# Altium PCB PCB1.PcbDoc
Units mil, origin at the board's own origin, x right, y up, seen from the top; angles counter-clockwise.
Board outline 3306.97 x 3267.27 mil, 2 copper layers (Component Side, Bottom Layer), stack 12.8 mil thick; 73 components, 54 nets, 311 pads, 524 vias.
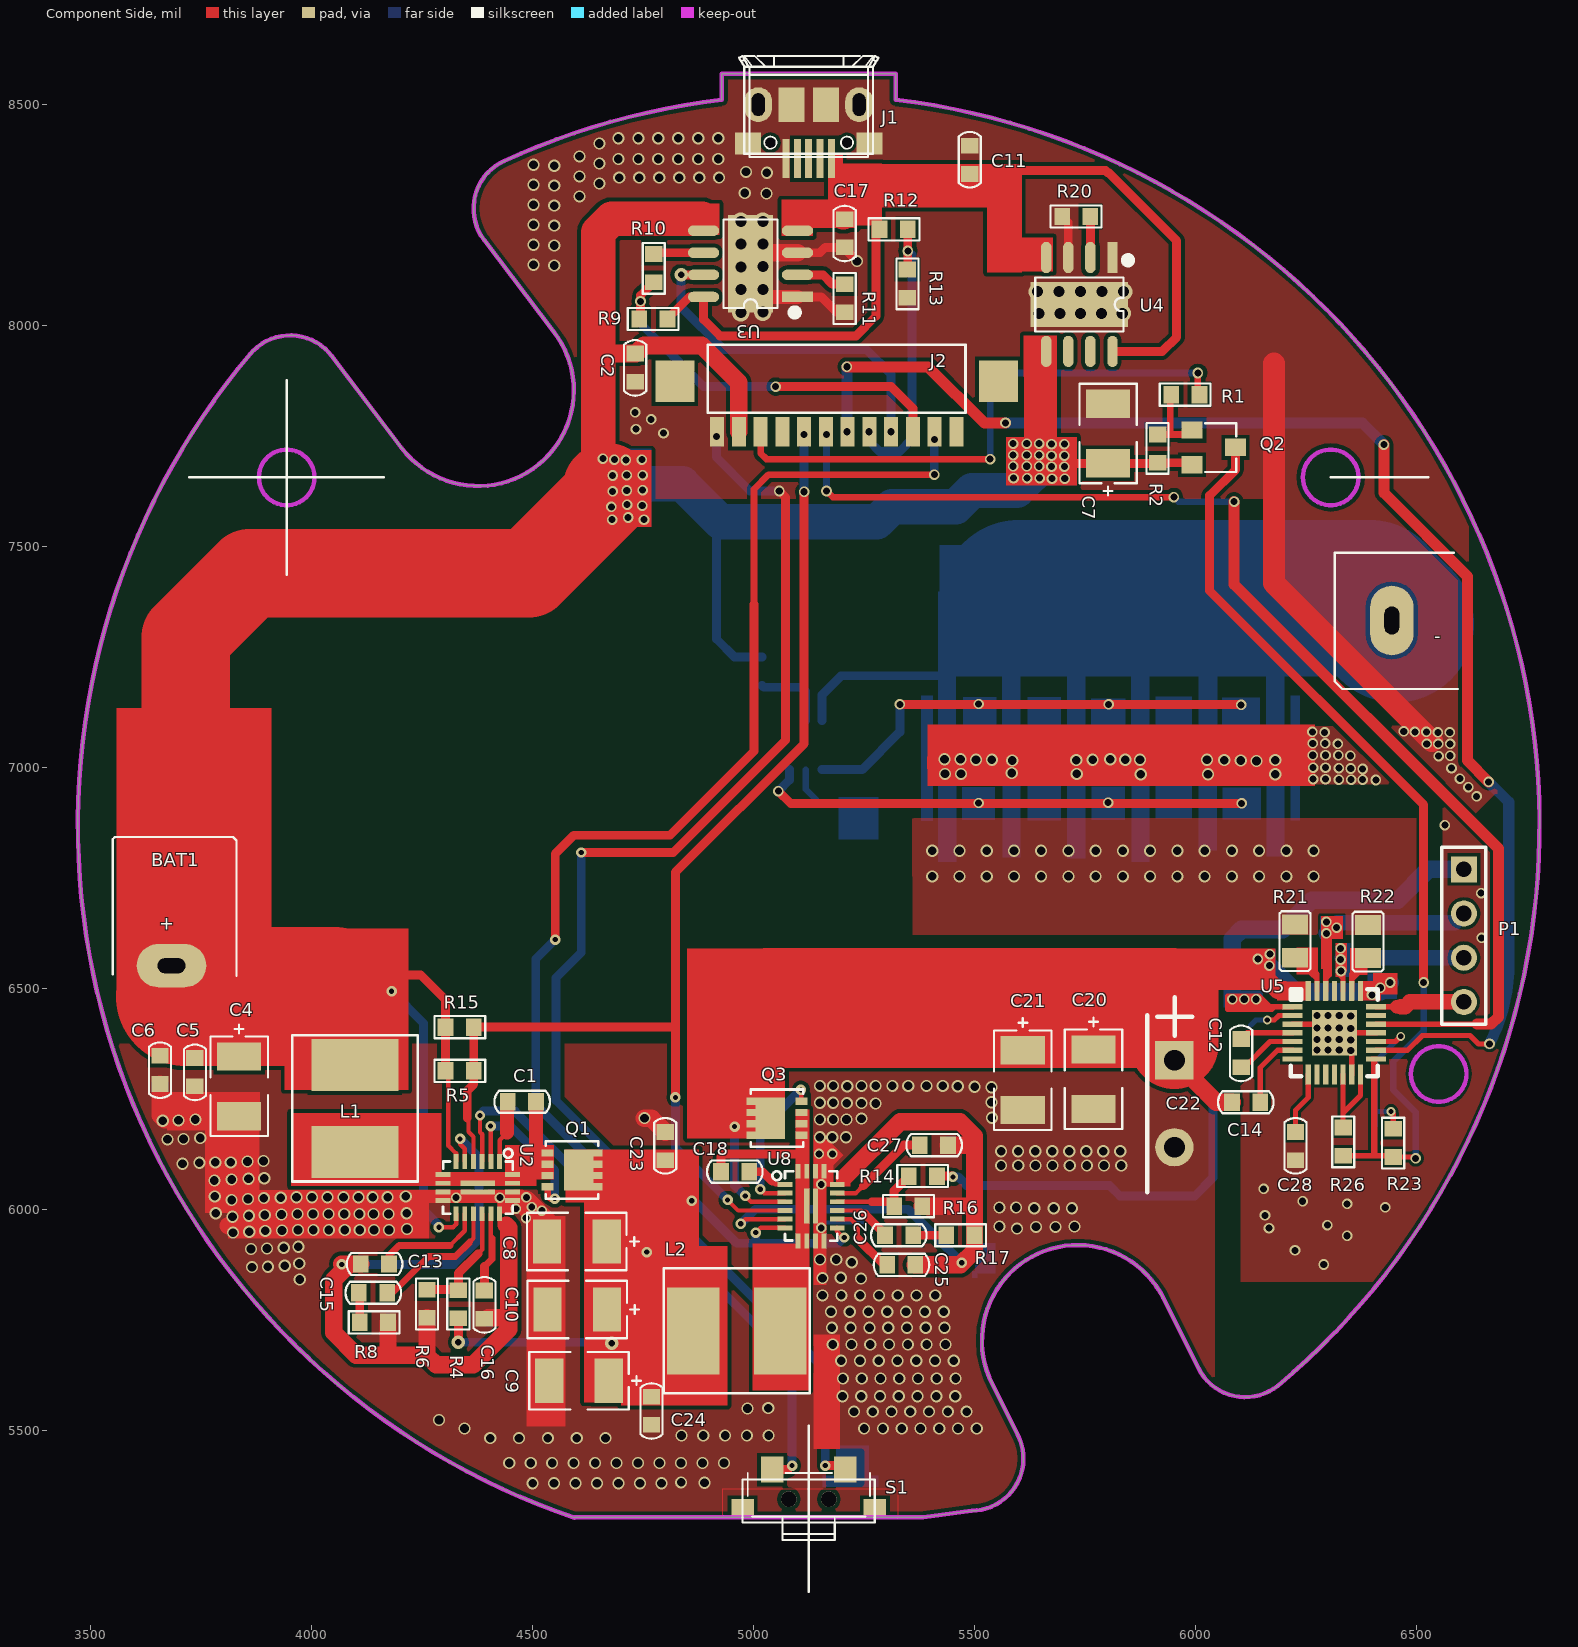
[diagram p0: Component Side view]
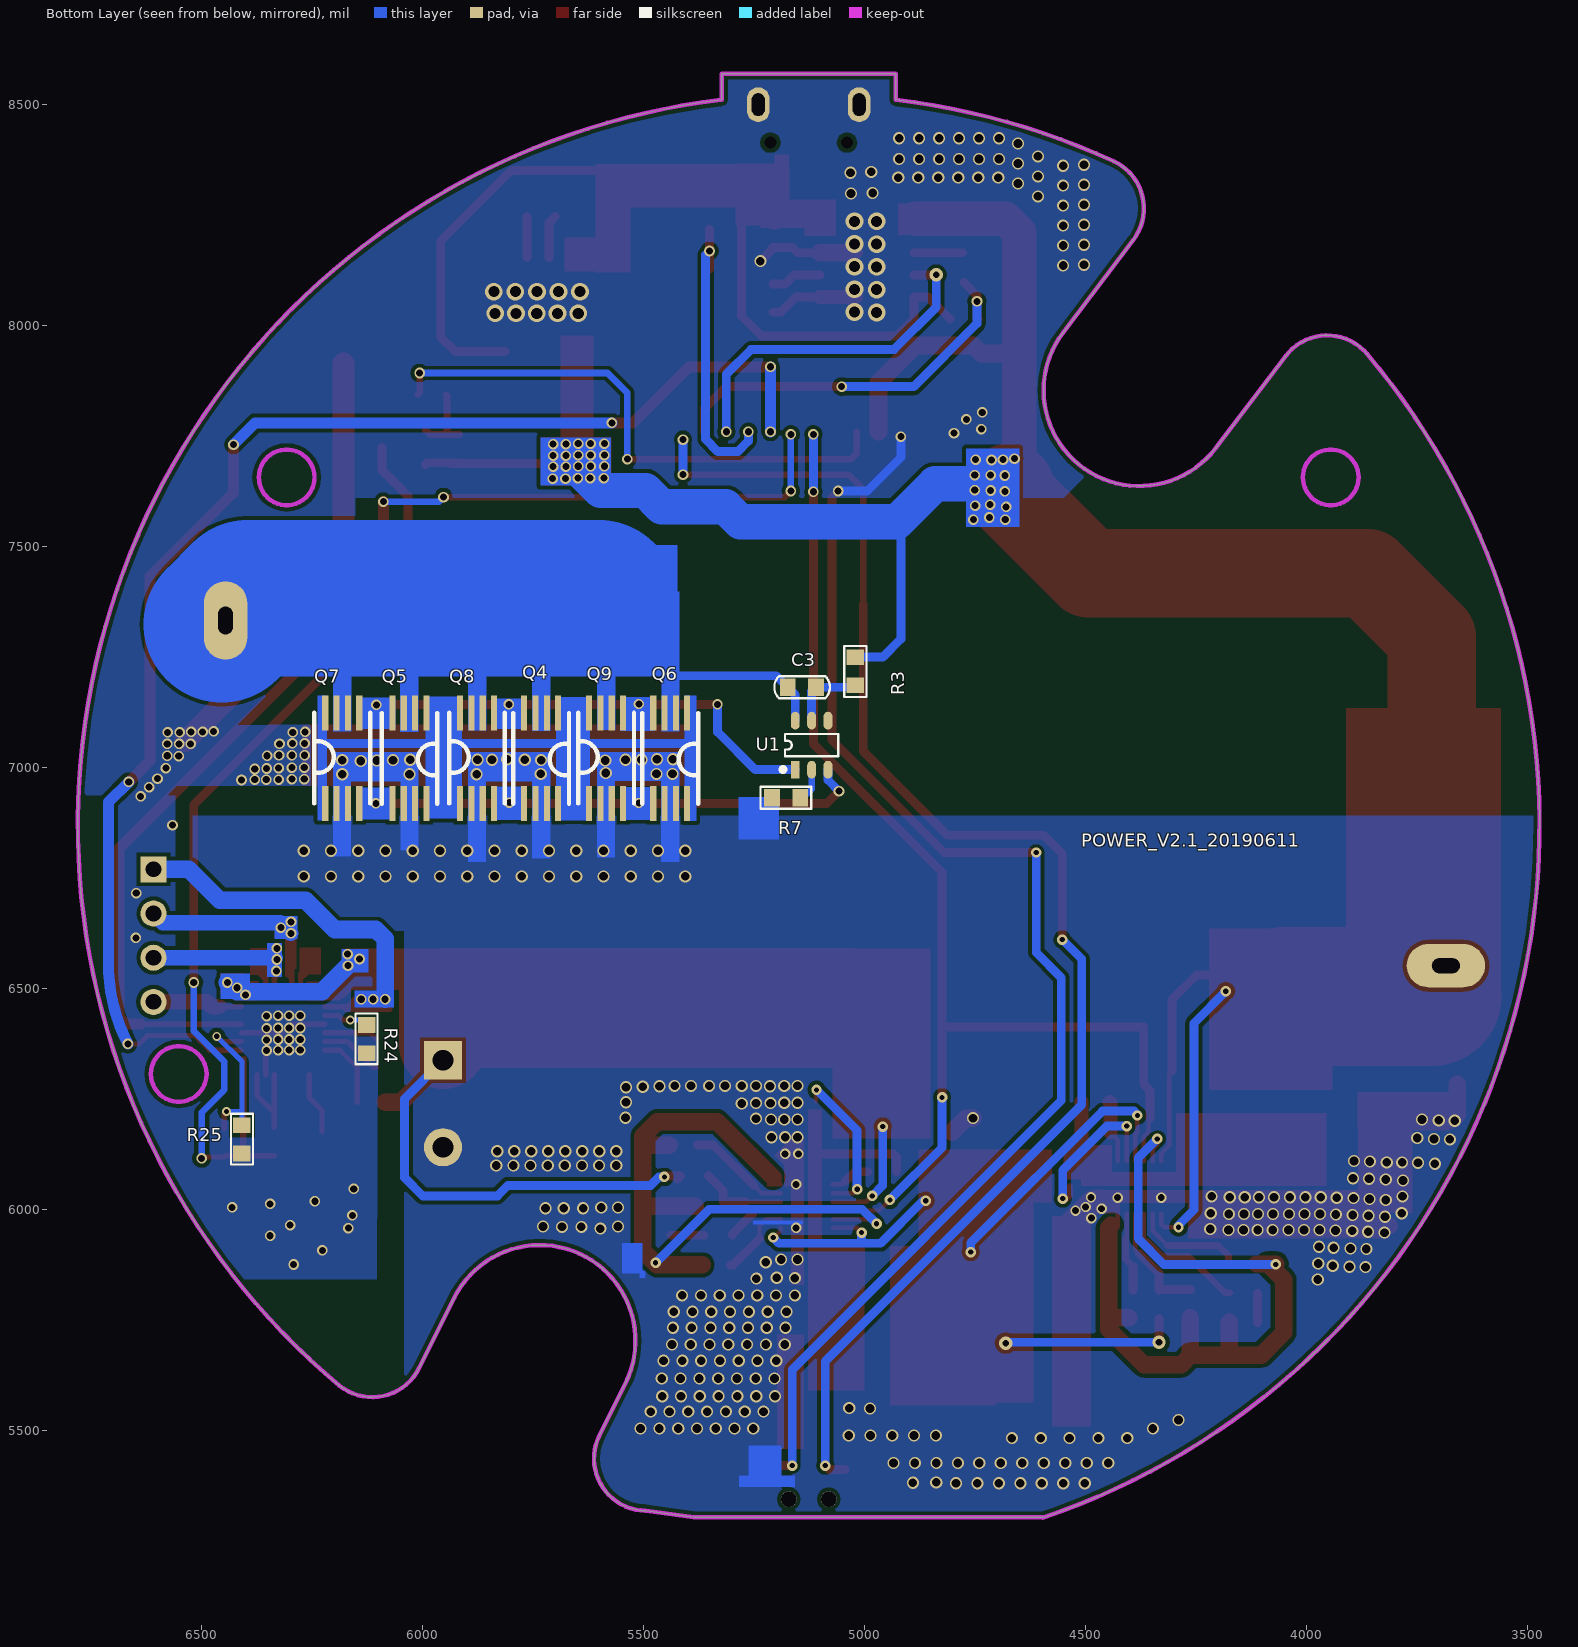
[diagram p1: Bottom Layer view, seen from below]

## Layer stack, top to bottom
Top Solder: solder mask 0.4, Solder Resist, Dk 3.5
Component Side: signal copper 1.4
Dielectric 1: core 10, FR-4, Dk 4.2
Bottom Layer: signal copper 1.4
Solder Side: solder mask 0.4, Solder Resist, Dk 3.5

## Board outline
4205.22,7722.68 4046.52,7931.5 ccw(c3952.49,7860.03) 3862.24,7936.23 3862.25,7936.24 ccw(c5125.65,6869.45) 4596.01,5303.03 4596.26,5303.74 5385.14,5303.74 5494.14,5318.42 5494.96,5318.74 ccw(c5493.31,5436.84) 5598.95,5489.66 5540.52,5606.51 cw(c5734.2,5703.35) 5927.88,5800.19 6007.48,5640.97 ccw(c6113.12,5693.79) 6187.33,5601.9 6187.4,5601.82 ccw(c5125.65,6869.45) 5322.5,8511.24 5322.5,8570.29 4928.8,8570.29 4928.8,8511.24 ccw(c5125.65,6869.45) 4436.1,8372.36 ccw(c4485.35,8265.01) 4391.32,8193.54 4550.01,7984.73 cw(c4377.62,7853.71)

## Design rules (kind name [scope] priority, off if disabled: settings)
Clearance [All] p1: gap=7
ComponentClearance [All] p1 off: gap=10 collisioncheckmode=3 verticalgap=10 showdistances=FALSE
Height [All] p1 off: minheight=0 maxheight=1000 prefheight=500
HoleSize [All] p1: absolutevalues=TRUE maxlimit=1000 minlimit=1 maxpercent=80.000 minpercent=20.000
HoleToHoleClearance [All] p1 off: gap=10 allowstackedmicrovias=TRUE
MinimumSolderMaskSliver [All] p1 off: minsoldermaskwidth=10
NetAntennae [All] p1 off: netantennaetolerance=0
PolygonConnect [All] p1: connectstyle=Direct reliefconductorwidth=10 reliefentries=4 polygonreliefangle="90 Angle" airgapwidth=10
RoutingVias [All] p1: holewidth=28 width=50 viastyle="Through Hole" minholewidth=28 minwidth=50 maxholewidth=28 maxwidth=50
SilkToSilkClearance [All] p1 off: silktosilkclearance=10
SilkToSolderMaskClearance [IsPad] p1 off: minsilkscreentomaskgap=10 clearancetoexposedcopper=TRUE
SolderMaskExpansion [All] p1: expansion=4
Width [All] p1: maxlimit=1000 minlimit=10 preferedwidth=10 minimp=50.000000 maximp=50.000000 favimp=50.000000
22 further rules are at their usual default settings.

## Components (designator, comment, footprint, x,y, rotation, side; value= is the part's Value field where it differs from the comment)
BAT1 "BAT1" BAT18650_DIP2 5125.65,6869.45 r0 top
C1 "0.1uF" C0603 4445,6244 r0 top
C2 "10uF" C0603 4733,7937 r270 top
C3 "0.1uF" C0603 5173,7182 r180 bottom
C4 "220uf/6.3V" C1210-E 3837,6279 r270 top
C5 "10uF" C0603 3737,6343 r270 top
C6 "0.1uF" C0603 3658,6348 r270 top
C7 "220uF/6.3V" C1210-E 5803,7756 r90 top
C8 "22uF/25v" C1210-E 4601,5928 r180 top
C9 "22uF/25v" C1210-E 4606,5613 r180 top
C10 "22uF/25v" C1210-E 4602,5774 r180 top
C11 "10uF" C0603 5490,8343 r90 top
C12 "0.1uF" C0603 6104,6386 r270 top
C13 "2.2uF" C0603 4176,5877 r180 top
C14 "0.1uF" C0603 6147,6243 r180 top
C15 "6.8nF" C0603 4108,5812 r0 top
C16 "2.2uF" C0603 4392,5817 r270 top
C17 "10uF" C0603 5207,8241 r270 top
C18 "0.1uF" C0603 4991,6086 r180 top
C20 "22uF/25v" C1210-E 5770,6295 r270 top
C21 "22uF/25v" C1210-E 5610,6293 r270 top
C22 "22uF/25v" CAP12R5X30 5953,6338 r90 top
C23 "10uF" C0603 4801,6112 r90 top
C24 "0.1uF" C0603 4770,5577 r270 top
C25 "2.2uF" C0603 5303,5875 r0 top
C26 "6.8nF" C0603 5362,5942 r180 top
C27 "2.2uf" C0603 5377,6146 r0 top
C28 "0.1uF" C0603 6227,6112 r90 top
J1 "HEADER_6_2" MICRO_USB_J 5125.65,8500 r180 top
J2 "CON12" CON_12WT 5189,7760 r180 top
L1 "1.5uH/10W" L0630 4099,6229 r270 top
L2 "1.5uH" L0630 4963,5726 r0 top
P1 "Header 4" HDR1X4 6608,6770 r270 top
Q1 "FDMC7678" FDMC7678 4590,6090 r270 top
Q2 "SI2305" SOT23 5993,7764 r270 top
Q3 "FDMC7678" FDMC7678 5054,6207 r90 top
Q4 "8205A" TSSOP8 5731,7123.63 r0 bottom
Q5 "8205A" TSSOP8 6029,7123.63 r0 bottom
Q6 "8205A" TSSOP8 5439,7123.63 r0 bottom
Q7 "8205A" TSSOP8 6181,6918.91 r180 bottom
Q8 "8205A" TSSOP8 5876,6918.91 r180 bottom
Q9 "8205A" TSSOP8 5584,6918.91 r180 bottom
R1 "10K" R0603 6010,7844 r180 top
R2 "100K" R0603 5915,7690 r90 top
R3 "100R" R0603 5020,7250 r270 bottom
R4 "100K" R0603 4333,5754 r90 top
R5 "100K" R0603 4304,6314 r0 top
R6 "18K" R0603 4262,5819 r270 top
R7 "1K" R0603 5145,6932 r0 bottom
R8 "21K" R0603 4110,5745 r0 top
R9 "22K" R0603 4806,8015 r180 top
R10 "1K" R0603 4775,8162 r270 top
R11 "1.3K" R0603 5207,8094 r270 top
R12 "47K" R0603 5286,8218 r0 top
R13 "51K" R0603 5349,8127 r270 top
R14 "100K" R0603 5416,6076 r180 top
R15 "100K" R0603 4304,6413 r0 top
R16 "10K" R0603 5319,6008 r0 top
R17 "21K" R0603 5437,5942 r0 top
R20 "1.3K" R0603 5763,8247 r180 top
R21 "0.1R" R0805 6226,6570 r90 top
R22 "0.1R" R0805 6391,6569 r90 top
R23 "30K" R0603 6448,6183 r270 top
R24 "100K" R0603 6126,6354 r90 bottom
R25 "10K" R0603 6408,6127 r90 bottom
R26 "100K" R0603 6335,6186 r270 top
S1 "SW_3X6X5" SW3X6X3R5 5125.65,5345 r0 top
U1 "DW01B" SOT23-6 5119,7051 r180 bottom
U2 "MP3428A" QFN22 4377,6050 r270 top
U3 "TP4056" SOIC8E 4994,8140 r90 top
U4 "TP4056" SOIC8E 5738,8048 r180 top
U5 "A4988" QFN28 6315,6400 r0 top
U8 "MP3428A" QFN22 5131,6008 r0 top

## Footprints (in the part's own frame and the unit in brackets; to place one, negate y for a bottom-side part, rotate by r counter-clockwise, add the part's x,y. Pads: shape width x height; smd on the part's side, far side on the other; paste and mask are expansions set on the pad)
BAT18650_DIP2 [mm]
  oval 4x2.5 / inner oval 4x2 / far side oval 4.5x2.5 hole 0.85 slot 1.6 at 0 deg: 1(-36.618,-8.063)
  oval 2.5x4 / inner oval 2x4 / far side oval 2.5x4.5 hole 0.85 slot 1.6 at 90 deg: 2(33.512,11.774)
C0603 [mm]
  rect 0.9x1 smd: 1(0,0) 2(1.62,0)
  silkscreen extent -0.77,-0.64 2.42,0.64
C1210-E [mil]
  rect 64x100 smd: 1(-67.5,0) 2(67.5,0)
  silkscreen extent -140,-65 113,65
CAP12R5X30 [mm]
  rect 2.2x2.2 / inner rect 2x2 / far side rect 2.2x2.2 hole 1.2: 1(0,0)
  round 2.2 / inner round 2 / far side round 2.2 hole 1.2: 2(-5,0)
  silkscreen extent -7.58,-1.02 3.61,1.56
CON_12WT [mm]
  rect 0.8x1.7 smd: 1(-6.875,0) 2(-5.625,0) 3(-4.375,0) 4(-3.125,0) 5(-1.875,0) 6(-0.625,0) 7(0.625,0) 8(1.875,0) 9(3.125,0) 10(4.375,0) 11(5.625,0) 12(6.875,0)
  rect 2.25x2.4 smd: 13(9.3,-2.9) 14(-9.3,-2.9)
  silkscreen extent -7.4,-5 7.4,-1.1
FDMC7678 [mm]
  rect 0.42x0.7 smd: 1(-0.975,-1.4) 2(-0.325,-1.4) 3(0.325,-1.4) 4(0.975,-1.4) 5(0.975,1.4) 6(0.325,1.4) 7(-0.325,1.4) 8(-0.975,1.4)
  rect 2.37x1.7 smd: 9(0,0.381)
  silkscreen extent -1.65,-1.5 1.65,1.5
HDR1X4 [mm] "Connector; Header; 4 Position"
  rect 1.5x1.5 hole 0.9: 1(0,0)
  round 1.5 hole 0.9: 2(2.54,0) 3(5.08,0) 4(7.62,0)
  silkscreen extent -1.27,-1.27 8.89,1.27
L0630 [mm]
  rect 3x5 smd: 1(-2.5,0) 2(2.5,0)
  silkscreen extent -4.2,-3.6 4.2,3.6
MICRO_USB_J [mm]
  rect 0.4x2.25 smd: 1(-1.3,3.1) 2(-0.65,3.1) 3(0,3.1) 4(0.65,3.1) 5(1.3,3.1)
  oval 1.6x2 / inner oval 1.3x1.6 / far side oval 1.3x2 hole 0.75 slot 1.3 at 90 deg: 6(-2.9,0) 7(2.9,0)
  rect 1.5x2 smd: 8(-1,0) 9(1,0)
  rect 1.5x1.25 smd: 10(-3.5,2.225) 11(3.5,2.225)
  round 0.6 hole 0.7: 12(2.2,2.18) 13(-2.2,2.18)
  silkscreen extent -3.7,-2.8 3.7,3
QFN22 [mm]
  rect 0.85x0.28 smd: 1(-1.5,1.25) 2(-1.5,0.75) 3(-1.5,0.25) 4(-1.5,-0.25) 5(-1.5,-0.75) 6(-1.5,-1.25) 11(1.5,-1.25) 12(1.5,-0.75) 13(1.5,-0.25) 14(1.5,0.25) 15(1.5,0.75) 16(1.5,1.25)
  rect 0.28x0.85 smd: 7(-0.75,-2) 8(-0.25,-2) 9(0.25,-2) 10(0.75,-2) 17(0.75,2) 18(0.25,2) 19(-0.25,2) 20(-0.75,2)
  rect 0.3x2 smd: 21(-0.25,0) 22(0.25,0)
  silkscreen extent -2.22,-2 1.5,2
QFN28 [mm]
  rect 2.6x2.6 smd: 0(0,0)
  rect 1.15x0.3 smd: 1(-2.4,1.5) 2(-2.4,1) 3(-2.4,0.5) 4(-2.4,0) 5(-2.4,-0.5) 6(-2.4,-1) 7(-2.4,-1.5) 15(2.4,-1.5) 16(2.4,-1) 17(2.4,-0.5) 18(2.4,0) 19(2.4,0.5) 20(2.4,1) 21(2.4,1.5)
  rect 0.3x1.15 smd: 8(-1.5,-2.4) 9(-1,-2.4) 10(-0.5,-2.4) 11(0,-2.4) 12(0.5,-2.4) 13(1,-2.4) 14(1.5,-2.4) 22(1.5,2.4) 23(1,2.4) 24(0.5,2.4) 25(0,2.4) 26(-0.5,2.4) 27(-1,2.4) 28(-1.5,2.4)
  silkscreen extent -2.5,-2.5 2.5,2.5
R0603 [mm]
  rect 0.9x1 smd: 1(0,0) 2(1.62,0)
  silkscreen extent -0.64,-0.64 2.29,0.64
R0805 [mm]
  rect 1.14x1.5 smd: 1(0,0) 2(1.91,0)
  silkscreen extent -0.76,-0.89 2.67,0.89
SOIC8E [mm]
  rect 0.6x1.8 smd: 1(-1.905,-2.7)
  oval 0.6x1.8 smd: 2(-0.635,-2.7) 3(0.635,-2.7) 4(1.905,-2.7) 5(1.905,2.7) 6(0.635,2.7) 7(-0.635,2.7) 8(-1.905,2.7)
  rect 5.588x2.6 smd: 9(0,0)
  silkscreen extent -3.08,-2.82 2.54,1.55
SOT23 [mm]
  rect 1x1.2 smd: 1(0,0) 2(2,0) 3(1,2.5)
  silkscreen extent -0.38,0.76 2.41,2.54
SOT23-6 [mil]
  rect 20x40 smd: 1(-37,-55.5)
  oval 20x40 smd: 2(0,-55.5) 3(37,-55.5) 4(37,55.5) 5(0,55.5) 6(-37,55.5)
  silkscreen extent -70,-60 60,25
SW3X6X3R5 [mm]
  rect 1.3x1.5 smd: 1(-2.1,1.7) 2(2.1,1.7)
  rect 1.3x1 smd: 3(3.8,-0.5) 4(-3.8,-0.5)
  round 0.9 hole 0.9 unplated: 5(-1.15,0) 6(1.15,0)
  silkscreen extent -3.5,-2 3.52,1.51
TSSOP8 [mm]
  rect 0.35x2 smd: 1(-0.975,0) 2(-0.325,0) 3(0.325,0) 4(0.975,0) 5(0.975,5.2) 6(0.325,5.2) 7(-0.325,5.2) 8(-0.975,5.2)
  silkscreen extent -1.6,0 1.6,5.21

## Part data
C1 C2 C3 C4 C5 C6 C7 C8 C9 C10 C11 C12 C13 C14 C15 C16 C17 C18 C20 C21 C22 C23 C24 C25 C26 C27 C28: library part C
L1 L2: library part L
P1: "Header, 4-Pin"
Q2: library part FDN338P
Q4 Q5 Q6 Q7 Q8 Q9: library part 8205A-TSSOP8
R1 R2 R3 R4 R5 R6 R7 R8 R9 R10 R11 R12 R13 R14 R15 R16 R17 R20 R21 R22 R23 R24 R25 R26: library part R
U1: library part DW01V

## Via types
v1: diameter 27.56, hole 19.68, Component Side to Bottom Layer, 312 vias
v2: diameter 24, hole 16, Component Side to Bottom Layer, 144 vias
v3: diameter 23.62, hole 11.81, Component Side to Bottom Layer, 24 vias
v4: diameter 40, hole 25, Component Side to Bottom Layer, 20 vias
v5: diameter 23.62, hole 15.75, Component Side to Bottom Layer, 18 vias
v6: diameter 20, hole 12, Component Side to Bottom Layer, 3 vias
v7: diameter 30, hole 15, Component Side to Bottom Layer, 3 vias

## Nets (pads, with @x,y where several pads share a name; then routed paths per layer and width w, separated by ;. In a path a pad name is that pad's centre, name@x,y a point inside that pad or via, vN(x,y) a via of type N, cw(c..) or ccw(c..) an arc to the next point about the centre after c; other vN are vias at no path point)
1A: P1.3 U5.24 | length 314.3
  Component Side w12: v2@6328,6531 6334.69,6524.31 U5.24
  Bottom Layer w35: v2@6333,6570 P1.3
  other v2: 6330,6540 6329,6566 6329,6591
1B: P1.4 U5.21 | length 203
  Component Side w12: U5.21 6455.94,6459.06
  Component Side w30: 6455.94,6459.06 6465.06,6459.06
  Component Side w35: 6465.06,6459.06 6475.06,6459.06 6486,6470 P1.4
2A: P1.2 U5.26 | length 379.7
  Component Side w12: U5.26 6295.31,6523.31 ; 6295.31,6532.31 6295.31,6523.31 ; 6304,6532 6295.31,6523.31
  Bottom Layer w35: v2(6297,6625) 6321,6649 6587,6649 P1.2
  other v2: 6320,6638 6297,6651
2B: P1.1 U5.1 | length 1285.4
  Component Side w12: v2@6087,6466 6153,6466 6143,6476 v2(6138,6476) v2(6111,6476) v2(6084,6476) 6080,6472 6080,6463 6085,6458 6178,6458 6173,6453 6073,6453 6073,6483 6145,6483 6168.94,6459.06 U5.1
  Bottom Layer w35: v2@6086,6478 6097,6478
  Bottom Layer w40: v2(6084,6476) 6084,6613 6105,6634 6198,6634 6264,6700 6458,6700 6528,6770 P1.1
BAT-: BAT1.2 C3.1 Q4.2 Q4.3 Q5.2 Q5.3 Q6.2 Q6.3 Q7.6 Q7.7 Q8.6 Q8.7 Q9.6 Q9.7 U1.6 | length 1224
  Bottom Layer w20: U1.6 5156,7165 C3.1 5199,7208 5427,7208
  Bottom Layer w354.33: 5601,7383 6395,7383 BAT1.2@6453.5,7324.5
BI: J2.7 U5.19 | length 2756.7
  Component Side w12: U5.19 6637.69,6419.69
  Component Side w15: v2(5166,7626) 5180,7612 v2(5952,7612)
  Component Side w25: v2(6088,7602) 6088,7415 6686,6817 6686,6436.37 6669.31,6419.69 6637.69,6419.69
  Bottom Layer w15: v2(5166,7626) v2(5166,7754) ; v2(5952,7612) 5962,7602 v2(6088,7602)
CHANGE_SEAL_PA11: J2.9
CHARGE_DET: J2.5 R12.2 R13.1 | length 659.5
  Component Side w20: R13.1@5349.78,8127.78 R12.2
  Bottom Layer w20: v2(5262,7760) 5262,7739 5286,7715 5331,7715 5359,7743 5359,8160 v2(5350,8169)
CHARGE_EMPTY: J2.4 U3.7 | length 791.7
  Component Side w20: v7(4837,8115) U3.7
  Bottom Layer w20: v7(4837,8115) 4837,8042 4933,7946 5256,7946 5312.03,7889.97 v2(5312.03,7760)
CHARGE_LED: J2.3 R9.2 R10.2 | length 895.4
  Component Side w20: R9.2 4745,8017.78 v2(4745,8055) 4745,8068.22 R10.2 ; v2(5051,7862) 5245,7862 5312,7862 5361.24,7812.76 J2.3
  Bottom Layer w20: v2(4745,8055) 4745,8005 4888,7862 v2(5051,7862)
COUT: Q4.5 Q5.5 Q6.5 Q7.4 Q8.4 Q9.4 U1.3 | length 1118.5
  Component Side w20: v2(5057,6947) 5085,6919 v5(6105,6919)
  Bottom Layer w20: v2(5057,6947) 5082,6972 U1.3
  other v5: 5510,6920 5803,6921
D: Q4.1 Q4.8 Q5.1 Q5.8 Q6.1 Q6.8 Q7.1 Q7.8 Q8.1 Q8.8 Q9.1 Q9.8 | length 832
  Bottom Layer w20: 5392,7055 6224,7055
DOUT: Q4.4 Q5.4 Q6.4 Q7.5 Q8.5 Q9.5 U1.1 | length 1046.4
  Component Side w20: v5(5332,7143) v5(5804,7143) v5@6105,7143
  Bottom Layer w20: U1.1 5246.5,6995.5 5332,7081 v5(5332,7143)
  other v5: 6104,7142 5510,7144
ELECTRIC_LIMIT_PA8: J2.10 R1.1 | length 1262.8
  Component Side w15: J2.10 5016.76,7711.24 5030,7698 v2(5536,7698) ; v2(6006,7893) 6006,7848 R1.1
  Bottom Layer w15: v2(5536,7698) 5536,7848 5581,7893 v2(6006,7893)
FI: J2.6 U5.16 | length 3193.1
  Component Side w12: U5.16 6480.63,6360.63 6514,6394 6622,6394 6641,6375 v2(6666,6375)
  Component Side w25: v2(5212,7907) 5396,7907 5523,7780 v2(5571,7780) ; v2(6427,7731) 6427,7622 6616,7433 6616,7016 v2(6664,6968)
  Bottom Layer w25: v2(5212,7760) v2(5212,7907) ; v2(5571,7780) 6378,7780 v2(6427,7731) ; v2(6664,6968) 6709.49,6922.51 6709.49,6537.34 cw(c6309.99,6557.36) v2(6666,6375)
GND: C2.2 C4.2 C5.2 C6.2 C7.2 C8.2 C9.2 C10.2 C11.2 C13.2 C16.2 C17.2 C20.2 C21.2 C22.2 C23.2 C24.2 C25.2 C27.2 C28.1 J1.5 J1.6 J1.7 J1.8 J1.9 J1.10 J1.11 J2.12 Q4.6 Q4.7 Q5.6 Q5.7 Q6.6 Q6.7 Q7.2 Q7.3 Q8.2 Q8.3 Q9.2 Q9.3 R6.2 R7.2 R8.2 R11.2 R13.2 R16.2 R17.2 R20.2 R21.2 R22.2 R24.1 R25.1 S1.2 U2.5 U2.9 U2.10 U2.16 U2.17 U2.18 U2.22 U3.1 U3.3 U3.9 U4.1 U4.3 U4.9 U5.0 U5.3 U5.13 U5.18 U8.5 U8.9 U8.10 U8.16 U8.17 U8.18 U8.22 | length 9386.4
  Component Side w10: v3(4337,6160) 4337,6148 4347.47,6137.53 U2.5 ; U2.16 4426.21,5967.79 4432.47,5961.53 ; v3(4972,5968) 4982.47,5978.47 U8.5@5070.94,5978.47 ; U8.16@5189.06,6057.21 5206.21,6057.21 5206.21,6072.79
  Component Side w12: U5.3 U5.0@6295.31,6419.69 ; U5.0 U5.18 ; U5.13 U5.0@6354.37,6360.63
  Component Side w19.68: v3(4611,6808) 4819,6808 5073,7062 5073,7612 v2(5059,7626) ; U8.17 U8.17@5160.53,6093.82 ; v3(5163,5421) 5199.26,5421 S1.2
  Component Side w20: U3.1 5154,8065 5188.78,8030.22 R11.2 ; U3.3 5151,8165 5163.22,8177.22 C17.2 5207,8174 v1(5235,8146) ; R20.2 5713,8233.22 U4.3
  Component Side w31.5: U3.9@5019,8065 U3.1 ; U3.9@5019,8165 U3.9@5039,8165
  Component Side w39.37: C6.2 3658,6214 v1@3669,6203 ; 3812,5964 3853,5964 ; v3@4069,5877 4087,5877 ; C13.2 4087,5877 ; R8.2 4173.78,5671 ; R6.2 4262,5670 ; C16.2@4401,5755.22 4446.22,5755.22 4446.22,5728.22 ; 4441.26,5965.26 4447.19,5959.33 4447.19,5729.19 4446.22,5728.22 ; 4464,6026 4474,6026 4484,6016 ; 5206.21,6072.79 5332.43,6199 5468,6199 5500.78,6166.22 5500.78,6008 ; C25.2 5469,5875 5500.78,5906.78 R17.2 5500.78,6008 ; R16.2 5500.78,6008 ; C27.2 5480.56,6146 ; 4087,5877 4051,5841 4051,5722 4102,5671 4173.78,5671 ; 4173.78,5671 4261,5671 4262,5670 ; 4262,5670 4283,5649 4367,5649 4446.22,5728.22
  Component Side w40: v1(4754,6207) 4769.78,6207 C23.2 ; U3.9@5039,8165 U3.3
  Component Side w50: 6178,7914 6178,7418 6536,7060
  Component Side w55.12: 4484,6016 C8.2@4533.5,5966.5
  Component Side w78.74: v1(5433,7019) 5433,7003 6194,7003 6233,7042
  Bottom Layer w19.68: v3(4611,6808) 4611,6582 4554,6525 4554,6247 5163,5638 v3(5163,5421) ; v2(4917,7749) 4917,7702 4993,7626 v2(5059,7626)
  Bottom Layer w20: v3(4069,5876) 4322,5876 4380,5934 4380,6117 v3(4337,6160) ; v3(4972,5968) 5005,6001 5351,6001 v3(5472,5880)
  other v1: 4501,5381 4549.6,5381 4598.2,5381 4646.8,5381 4695.4,5381 4744,5381 4792.6,5381 4890,5382 4837,5383 4448,5427 4496.6,5427 4545.2,5427 4593.8,5427 4642.4,5427 4691,5427 4739.6,5427 4788.2,5427 4836.8,5427 4885.4,5427 4934,5427 4405,5483 4470.25,5483 4535.5,5483 4600.75,5483 4666,5483 4838,5489 4887.25,5489 4936.5,5489 4985.75,5489 5035,5489 4347,5505 5251,5505 5293.5,5505 5336,5505 5378.5,5505 5421,5505 5463.5,5505 5506,5505 4289,5524 5228,5543 5270.5,5543 5313,5543 5355.5,5543 5398,5543 5440.5,5543 5483,5543 4987,5550 5034,5551 5202,5578 5244.5,5578 5287,5578 5329.5,5578 5372,5578 5414.5,5578 5457,5578 5203,5618 5245.5,5618 5288,5618 5330.5,5618 5373,5618 5415.5,5618 5458,5618 5199,5658 5241.5,5658 5284,5658 5326.5,5658 5369,5658 5411.5,5658 5454,5658 5180,5695 5222.5,5695 5265,5695 5307.5,5695 5350,5695 5392.5,5695 5435,5695 5178,5733 5220.5,5733 5263,5733 5305.5,5733 5348,5733 5390.5,5733 5433,5733 5176,5769 5218.5,5769 5261,5769 5303.5,5769 5346,5769 5388.5,5769 5431,5769 5157,5806 5199.5,5806 5242,5806 5284.5,5806 5327,5806 5369.5,5806 5412,5806 3974,5842 5244,5844 5157,5845 5198,5846 3866,5870 3902,5871 3940,5873 3973,5878 5223,5881 5151,5887 5188,5887 3864,5911 3900,5912 3938,5914 3971,5916 3823,5948 3860,5950 3896,5952 3934,5953 3970,5954 4005,5954 4040,5954 4076,5954 4110,5954 4142,5954 4176,5954 4217,5956 5597,5957 5640,5961 5684,5961 5557,5962 5727,5962 3822,5984 3859,5986 3895,5988 3933,5989 3969,5990 4004,5990 4039,5990 4075,5990 4109,5990 4141,5990 4175,5990 3784,5992 4216,5992 5636,6003 5680,6003 5721,6003 5557,6005 5595,6005 3820,6022 3857,6024 3893,6026 3931,6027 3967,6028 4002,6028 4037,6028 4073,6028 4107,6028 4139,6028 4173,6028 3782,6030 4214,6030 3781,6066 3820,6068 3858,6070 3894,6071 5561,6100 5599.8,6100 5638.6,6100 5677.4,6100 5716.2,6100 5755,6100 5793.8,6100 5832.6,6100 3709,6104 3747,6106 3783,6107 3818,6107 3856,6109 3892,6110 5561,6132 5599.5,6132 5638,6132 5676.5,6132 5715,6132 5753.5,6132 5792,6132 5830.5,6132 3675,6159 3711,6160 3749,6162 5150.97,6164.01 5179,6164.01 5210,6164 3664,6201 3700,6202 3738,6204 5150.97,6203.98 5180.97,6203.98 5211,6204 5245,6206 5540,6208 5277,6240 5212,6241 5245,6241 5150.97,6241.99 5180.97,6241.99 5539,6243 5539,6277 5501,6278 5213,6279 5463,6279 5150.97,6280 5180.97,6280 5245,6280 5277,6280 5315,6280 5351,6280 5392,6280 5429,6280 5405,6754 5466.64,6754 5528.29,6754 5589.93,6754 5651.57,6754 5713.21,6754 5774.86,6754 5836.5,6754 5898.14,6754 5959.79,6754 6021.43,6754 6083.07,6754 6144.71,6754 6206.36,6754 6268,6754 5405,6812 5466.64,6812 5528.29,6812 5589.93,6812 5651.57,6812 5713.21,6812 5774.86,6812 5836.5,6812 5898.14,6812 5959.79,6812 6021.43,6812 6083.07,6812 6144.71,6812 6206.36,6812 6268,6812 5877,6985 6029,6985 6181,6985 5434,6986 5470,6986 5732,6986 5585,6988 6139,7015 5586,7016 6103,7016 5731,7017 6066,7017 6181,7017 5504,7018 5540,7018 5768,7018 5842,7018 5875,7018 6027,7018 5469,7019 5808,7019 4550,8136 4503,8138 4550,8181.2 4503,8183.2 4550,8226.4 4503,8228.4 4550,8271.6 4503,8273.6 4607,8292.6 5030,8299 4981,8300 4550,8316.8 4503,8318.8 4652,8321.6 4697,8335 4742.2,8335 4787.4,8335 4832.6,8335 4877.8,8335 4923,8335 4607,8337.8 5031,8346 4984,8348 4550,8362 4503,8364 4652,8366.8 4695,8377 4740.2,8377 4785.4,8377 4830.6,8377 4875.8,8377 4921,8377 4607,8383 4652,8412 4695,8424 4740.2,8424 4785.4,8424 4830.6,8424 4875.8,8424 4921,8424
  other v2: 6291,5876 6226,5908 6344,5941 6167,5958 6299,5965 6158,5987 6430,6005 6344,6013 6243,6019 6155,6047 6352,6360 6276,6361 6301,6361 6326,6361 6352,6384 6276,6385 6301,6385 6326,6385 6352,6410 6276,6411 6301,6411 6326,6411 6352,6438 6276,6439 6301,6439 6326,6439 6648,6615 6647,6716 6565,6870 6637,6935 6618,6956 6409,6972 6325,6973 6353,6973 6379,6973 6267,6974 6295,6974 6599,6975 6379,6997 6352,6998 6325,6999 6580,6999 6267,7000 6295,7000 6551,7026 6351,7027 6577,7027 6266,7028 6295,7028 6324,7028 6323,7054 6524,7054 6550,7054 6577,7054 6266,7055 6294,7055 6293,7080 6549,7080 6576,7080 6265,7081 6497,7081 6523,7081 6472,7082 4797,7757 4735,7766 4769,7788 4733,7804
  other v4: 5647,8028 5694,8028 5741,8028 5788,8028 5835,8028 4972,8030 5022,8031 5643,8077 5691.75,8077 5740.5,8077 5789.25,8077 5838,8077 4972,8081.5 5022,8082.25 4972,8133 5022,8133.5 4972,8184.5 5022,8184.75 4972,8236 5022,8236
  other v5: 5154,5958.66 4486,5981 4522,5998 4463,6002 4499,6006 4328,6027 4426.77,6027 4487,6028 5154,6057.36 5149,6126 5179,6126
NetC1_1: C1.1 U2.1 | length 142.7
  Component Side w10: U2.1 4426.21,6157.21 4443,6174
  Component Side w31.5: 4443,6174 4443,6242 C1.1
NetC1_2: C1.2 L1.2 Q1.1 Q1.2 Q1.3 U2.7 U2.8 U2.19 U2.20 U2.21 | length 118.2
  Component Side w31.5: 4508.78,6125.78 C1.2
NetC3_2: C3.2 R3.2 U1.5 | length 170.5
  Bottom Layer w20: R3.2 5024.22,7182 C3.2 5119,7172.22 U1.5
NetC12_1: C12.1 U5.4 | length 122.3
  Component Side w12: C12.1 6118,6400 U5.4
NetC12_2: C12.2 U5.5 | length 140.6
  Component Side w12: C12.2 6111.22,6322.22 6169.31,6380.31 U5.5
NetC13_1: C13.1 U2.12 | length 252.3
  Component Side w10: 4314,5919 4347.47,5952.47 U2.12
  Component Side w15: C13.1 4176,5896 4199,5919 4314,5919
NetC14_1: C14.1 U5.6 | length 167.9
  Component Side w12: C14.1 6147,6321 6186.63,6360.63 U5.6
NetC15_1: C15.1 R8.1 | length 65
  Component Side w20: R8.1 C15.1@4110,5810
NetC15_2: C15.2 U2.13 | length 302.2
  Component Side w10: 4359,5927 4367.16,5935.16 U2.13
  Component Side w15: C15.2 4184,5812 4266,5894 4326,5894 4359,5927
NetC16_1: C16.1 U2.15 | length 178.5
  Component Side w10: 4406.53,5937.47 U2.15
  Component Side w15: 4392,5871 4409,5888 4409,5935
  Component Side w20: C16.1 4392,5871
NetC18_1: C18.1 U8.1 | length 91.9
  Component Side w10: 5043,6064 5049.79,6057.21 U8.1@5070.94,6057.21
  Component Side w19.68: C18.1 5021,6086 5043,6064
NetC18_2: C18.2 L2.2 Q3.1 Q3.2 Q3.3 U8.7 U8.8 U8.19 U8.20 U8.21 | length 206.8
  Component Side w19.68: C18.2 4927.22,6119.22 4934,6126 5098,6126
NetC25_1: C25.1 U8.12 | length 173.8
  Component Side w10: U8.12@5189.06,5978.47 5221.53,5978.47 5237,5963 5237,5934
  Component Side w20: 5237,5934 5296,5875 C25.1
NetC26_1: C26.1 R17.1 | length 75
  Component Side w20: C26.1 R17.1
NetC26_2: C26.2 U8.13 | length 134.1
  Component Side w10: U8.13@5189.06,5998.16 5244.84,5998.16 5253,5990
  Component Side w20: 5253,5990 5298.22,5944.78 C26.2
NetC27_1: C27.1 U8.15 | length 232.9
  Component Side w10: U8.15@5189.06,6037.53 5232.53,6037.53 5249,6054
  Component Side w20: 5249,6054 5341,6146 C27.1
NetC28_2: C28.2 U5.8 | length 141.7
  Component Side w12: C28.2 6227,6225 6255.94,6253.94 U5.8
NetQ1_4: Q1.4 U2.2 | length 369.1
  Component Side w10: U2.2 v3@4406.53,6189
  Component Side w15: Q1.4 4534.88,6031.88 4541.76,6025 v3(4551,6025)
  Bottom Layer w20: v3(4406,6189) 4451,6189 4551,6089 v3(4551,6025)
NetQ2_1: Q2.1 R1.2 R2.2 | length 173.4
  Component Side w15: R2.2 5944,7753.78 ; R1.2 5944,7841.78 5944,7753.78 ; Q2.1 5982.78,7753.78 5944,7753.78
NetQ3_4: Q3.4 U8.2 | length 346.1
  Component Side w10: v3(5016,6046) 5024.47,6037.53 U8.2@5070.94,6037.53 ; Q3.4 v3@5109.12,6269.88
  Bottom Layer w20: v3(5016,6046) 5016,6179 v3(5108,6271)
NetR4_2: R4.2 R6.1 U2.14 | length 265.2
  Component Side w10: 4377.32,5900.32 4386.84,5909.84 U2.14
  Component Side w20: R6.1 R4.2@4331.78,5819 ; R4.2 4333,5856 4377.32,5900.32
NetR7_1: R7.1 U1.2 | length 76.3
  Bottom Layer w15: U1.2 5119,6951 R7.1@5141.5,6928.5
NetR10_1: R10.1 U3.6 | length 109.7
  Component Side w20: R10.1@4778,8165 U3.6
NetR11_1: R11.1 U3.2 | length 115.4
  Component Side w20: U3.2 5158,8115 5179,8094 R11.1
NetR14_2: R14.2 R16.1 U8.14 | length 201.9
  Component Side w10: U8.14@5189.06,6017.84 5269,6017.84
  Component Side w20: 5269,6017.84 5319,6017.84 5319,6042.78 R14.2
NetR20_1: R20.1 U4.2 | length 92.7
  Component Side w20: U4.2 R20.1
NetR21_1: R21.1 U5.27 | length 48.3
  Component Side w12: 6269,6540 6275.63,6533.37 U5.27
NetR22_1: R22.1 U5.23 | length 89.7
  Component Side w12: U5.23 6354.37,6532.37 R22.1
NetR23_1: R23.1 R25.2 U5.17 | length 359.3
  Component Side w12: U5.17 6453.31,6380.31 v6(6465,6392) ; v6(6443,6222) 6448,6217 R23.1
  Bottom Layer w12: R25.2 6408,6335 v6(6465,6392) ; 6410,6222 v6(6443,6222)
NetR24_2: R24.2 U5.2 | length 103.5
  Component Side w12: v6(6163,6429) 6179,6429 6189.37,6439.37 U5.2
  Bottom Layer w12: R24.2 6137.22,6429 v6(6163,6429)
NetR26_1: R26.1 U5.12 U5.14 | length 222.3
  Component Side w12: R26.1@6334.69,6186.31 6334.69,6218.69 ; U5.12 6334.69,6218.69 ; U5.14 6374.06,6258.06 6334.69,6218.69
SYS_ON/OFF: J2.2 S1.1 | length 3331
  Component Side w15: 5002,7369 5002,7630 5035,7663 v2(5410,7663)
  Component Side w19.68: v3(4552,6611) 4552,6805 4594,6847 4812,6847 5002,7037 5002,7369 ; S1.1 5078.93,5411.93 v3(5088,5421)
  Bottom Layer w19.68: v3(4552,6611) 4508,6567 4508,6237 5088,5657 v3(5088,5421) ; v2(5410,7663) v2(5410,7742)
VBAT: BAT1.1 C2.1 C4.1 C5.1 C6.1 C7.1 J2.11 L1.1 Q2.2 R2.1 R3.1 R5.1 R15.1 U2.6 U2.11 U3.5 U4.5 | length 6359.6
  Component Side w10: v3(4289,5960) 4321,5960 4327.79,5966.79 U2.11 ; R5.1 4310,6308 4310,6145 4327.79,6127.21 U2.6
  Component Side w20: 4050.78,6482.22 4099.57,6531 4248,6531 4304,6475 R5.1 ; v2@5650,7681 5657.5,7688.5 C7.1 5803.24,7688.26 R2.1@5934,7688.26 ; R2.1 5988.26,7690 Q2.2
  Component Side w40: 4652.36,7937 C2.1 4735,7937 4753,7955 4884,7955 4967.54,7871.46 J2.11
  Component Side w75: v2@5650,7681 5650,7931
  Component Side w78.74: v2@4649.36,7699 4649.36,8211.36 4680,8242 4884,8242
  Component Side w200: 3716.2,6979.2 3716.2,7295.2 3861,7440 4492,7440 4669.73,7617.73 4669.73,7634
  Component Side w314.96: 3716.2,6482.22 4050.78,6482.22
  Bottom Layer w19.68: v3(4182,6494) 4254,6422 4254,6000 4289,5965 v3(4289,5960)
  Bottom Layer w20: 4917,7565 4917,7291 4958,7250 R3.1
  Bottom Layer w80: 4702,7642 4749,7642 4840,7642 4917,7565 4926,7556 5280,7556 5314,7590 5458,7590 5495,7627 5596,7627 5660,7691
  other v2: 4681,7561 4753,7561 4717,7566 4679,7590 4749,7593 4715,7595 4682,7625 4714,7627 4750,7628 5676,7654 5705,7654 5589,7655 5620,7655 5648,7655 4682,7661 4714,7662 4750,7662 5675,7681 5704,7681 5588,7682 5619,7682 5647,7682 4712,7696 4686,7697 4748,7697 4660,7699 5675,7706 5704,7706 5588,7707 5619,7707 5647,7707 5675,7732 5704,7732 5588,7733 5619,7733 5647,7733
VCC5V: C11.1 C17.1 J1.1 R9.1 R12.1 U3.4 U3.8 U4.4 U4.8 | length 1645.7
  Component Side w20: R9.1 4856,8065 U3.8 4887.7,8014.3 4925,7977 5233,7977 5278,8022 5278,8241 ; 5592,8351 5797.65,8351 5801.93,8346.72 5803.28,8346.72 5958,8192 5958,7974 5925.7,7941.7 U4.8
  Component Side w66.93: C17.1@5204,8251 5204,8292
VCC8V: C8.1 C9.1 C10.1 C23.1 C24.1 L2.1 Q1.5 Q1.6 Q1.7 Q1.8 Q1.9 R4.1 U2.3 U8.6 U8.11 | length 1547.1
  Component Side w10: v3(4382,6213) 4382,6175.19 4386.84,6170.35 U2.3 ; v3(5006,5948) 5016.79,5958.79 U8.6@5070.94,5958.79 ; U8.11@5189.06,5958.79 5189.06,5951.94 5204,5937 v3(5206,5937)
  Component Side w20: v7(4333,5700) R4.1
  Bottom Layer w20: v7(4333,5700) 4678,5700 v7(4680,5698) ; v3(4382,6213) 4382,6215 4390,6223 4461,6223 4759,5925 v3(4759,5904) ; v3(4861,6020) 4867,6020 4963,5924 5193,5924 v3(5206,5937) ; 5006,5925 v3(5006,5948)
VCC12V: C14.2 C20.1 C21.1 C22.1 Q3.5 Q3.6 Q3.7 Q3.8 Q3.9 R14.1 U5.22 U5.28 U8.3 | length 3040.5
  Component Side w10: v3(4982,6031) 4995.16,6017.84 U8.3@5070.94,6017.84
  Component Side w20: R14.1@5423,6069 R14.1 v3@5450,6076
  Component Side w40: C22.1 6048,6243 C14.2 ; 5953,6486 5998,6531 6153,6531 6187,6497 6202,6497
  Component Side w200: 5033,6492 5947,6492 ; C22.1@5953,6373 5953,6486
  Bottom Layer w20: v3(4958,6188) 4958,6055 v3(4982,6031) ; v3(5452,6074) 5464,6074 5483,6055 5806,6055 5830,6031 5999,6031 6040,6072 6040,6251 C22.1
  Bottom Layer w40: v2@6147,6564 6156,6564 6227,6493 6420,6493 v2(6441,6514)
  other v2: 6400,6486 6419,6502 6168,6552 6142,6567 6169,6578
VCC12V_EN: J2.8 R5.2 R15.2 U2.4 U8.4 | length 2810.3
  Component Side w10: 4356,6207 4356,6176 4367.16,6164.84 U2.4 ; v3(4942,6022) 4965.84,5998.16 U8.4@5070.94,5998.16
  Component Side w20: 4353.19,6207 4353.19,6269.19 4367.78,6283.78 R5.2 R15.2 4823,6413 ; v3(4824,6254) 4824,6763 5115.18,7054.18 v2(5115.18,7624.18)
  Bottom Layer w20: v3(4824,6254) 4824,6140 v3(4942,6022) ; v2(5115.18,7624.18) v2(5115.18,7754.18)
VDD_MORTOR: Q2.3 R23.2 R26.2 U5.15 | length 2050.1
  Component Side w12: R26.2 6445,6122.22 R23.2 6495.78,6119.22 v2(6499,6116)
  Component Side w20: Q2.3 6091.43,7674.43 6032.43,7615.43 6032.43,7400.57 6517,6916 v2(6517,6514)
  Bottom Layer w15: v2(6499,6116) 6499,6220 6448,6271 6448,6335 6517,6404 v2(6517,6514)
pads on no net: J1.2 J1.3 J1.4 J1.12 J1.13 J2.1 J2.13 J2.14 S1.3 S1.4 S1.5 S1.6 U1.4 U4.6 U4.7 U5.7 U5.9 U5.10 U5.11 U5.20 U5.25

## Polygon pours and split planes (outlines as drawn)
GND on Component Side "Component Side-No Net" (solid, remove dead copper, pour order 24): 4933,5307 4931,5309 4931,5368 5321,5368 5327,5362 5327,5301
GND on Component Side "Top Solder-No Net" (solid, remove dead copper, pour order 30): 5360,6891 5365,6886 6517,6886 6517,6623 6518,6622 6351,6622 5361,6622
GND on Component Side "Top Solder-No Net" (solid, remove dead copper, pour order 36): 6427,7095 6606,7095 6607,7094 6610,7091 6610,7002 6610,6999 6576,6965 6572,6961 6541,6961 6541,6968 6422,7087
GND on Component Side "Top Solder-No Net" (solid, remove dead copper, pour order 38): 6252,7096 6254,7094 6346,7094 6346,7084 6459,6971 6458,6970 6458,6962 6249,6962 6248,6961
GND on Component Side "Top Solder-No Net" (solid, remove dead copper, pour order 42): 6546,6968 6568,6968 6616,7016 6683,6949 6683,6941 6679,6941 6623,6885
GND on Component Side "Top Solder-No Net" (solid, remove dead copper, pour order 58): 6560,6927 6560,6346 6562,6344 6558,6340 6163,6340 6102,6279 6103,6278 6103,5837 6621,5837 6637,5821 6787,5971 6818,5971 6818,5981 6831,5994 6884,6047 6884,6910
GND on Component Side "Top Solder-No Net" (solid, remove dead copper, pour order 60): 6619,7057 6619,8731 6596,8754 6530,8688 4100,8688 4100,8181 4434,7847 4673,7608 4698,7608 6165,7608 6171,7614 6186,7599 6186,7424 6186,7402 6513,7075
GND on Component Side "Top Solder-No Net" (solid, remove dead copper, pour order 64): 6044,6524 6044,5593 5535,5084 5450,5169 4074,5169 4074,5398 3431,6041 3439,6049 3439,6375 5684,6375 5737,6428
GND on Bottom Layer "Top Solder-No Net" (solid, remove dead copper, pour order 40): 6251,7098 6252,7097 6252,6959 6584,6959 6627,7002 6618,7011 6618,7094
GND on Bottom Layer "Top Solder-No Net" (solid, remove dead copper, pour order 44): 6549,6965 6594,6920 6647,6920 6654,6920 6675,6941 6680,6946 6680,6952 6680,6953 6635,6998 6631,7002 6619,7002
GND on Bottom Layer "Top Solder-No Net" (solid, remove dead copper, pour order 56): 6100,6449 6092,6457 6092,6546 6547,6546 6557,6556 6559,6558 6559,6937 6694,6937 6713,6918 6714,6917 6714,6176 6714,6089 6476,5851 6467,5842 6103,5842
GND on Bottom Layer "Top Solder-No Net" (solid, remove dead copper, pour order 62): 4394,7766 4549,7611 6152,7611 6152,7363 6574,6941 6577,6938 7342,6938 7342,8941 7175,9108 7103,9036 4149,9036
GND on Bottom Layer "Top Solder-No Net" (solid, remove dead copper, pour order 66): 6047,5567 6041,5573 6041,6631 6195,6631 6264,6700 6271,6707 6466,6707 6469,6707 6495,6733 6519,6757 6519,6891 3381,6891 3157,6667 3249,6575 3249,4793 6089,4793 6180,4884

## Keep-outs
Keep-Out Layer:
  circle w10: c3944.55,7656.85 r62.99
  circle w10: c6306.75,7656.85 r62.99
  circle w10: c6551,6307 r62.99
  lines w10: 4596.01,5303.03 cw(c5125.65,6869.45) 3862.25,7936.24 cw(c3952.49,7860.03) 4046.52,7931.5 4205.22,7722.68 ccw(c4377.62,7853.71) 4550.01,7984.73 4391.32,8193.54 cw(c4485.35,8265.01) 4436.1,8372.36 cw(c5125.65,6869.45) 4928.8,8511.24 4928.8,8570.29 5322.5,8570.29 5322.5,8511.24 cw(c5125.65,6869.45) 6187.4,5601.82 ; 4596.26,5303.74 5385.14,5303.74 5494.14,5318.42 ; 5494.96,5318.74 ccw(c5493.31,5436.84) 5598.95,5489.66 5540.52,5606.51 cw(c5734.2,5703.35) 5927.88,5800.19 6007.48,5640.97 ccw(c6113.12,5693.79) 6187.33,5601.9

## Other copper
Component Side:
  rectangle net VDD_MORTOR: 6398,6122.22 6412,6346
  rectangle net VCC12V: 6402,6487 6458,6535
  rectangle net VCC12V: 6370,6473 6421,6517
  rectangle net VCC12V: 5933,6497 6182,6591
  rectangle net VCC12V: 6185,6473 6262,6516
  rectangle net 2A: 6285,6612 6334,6664
  rectangle net 1A: 6317,6539 6343,6603
  rectangle net 2A: 6285,6544 6310,6664
  rectangle net 2A: 6289,6527 6310,6579
  rectangle net 1A: 6318,6526 6340,6582
  region net NetR22_1: 6377.5,6536.5 6369.68,6544.32 6351.87,6526.5 6359.69,6518.69
  rectangle net NetR22_1: 6350,6531 6390,6592
  region net NetR21_1: 6272.32,6516.69 6278.63,6523 6262.2,6539.43 6255.88,6533.12
  rectangle net NetR21_1: 6229,6532 6278,6593
  rectangle net VBAT: 3559,6481 3910,7135
  rectangle net VBAT: 5612,7884 5687,7978
  rectangle net VCC5V: 5536,8122 5678,8200
  rectangle net VCC5V: 5529,8120 5608,8342
  rectangle net VCC5V: 5202,8267 5608,8366
  rectangle net GND: 5394,6959 6271,7098
  rectangle net GND: 5140.84,6052 5182,6122
  rectangle net VCC12V: 4850,6321 6039,6428
  rectangle net VCC12V: 4850,6161 5072,6591
  rectangle net GND: 5136,5829 5166,6169
  rectangle net GND: 5187.06,6052 5220,6072.79
  rectangle net NetC18_2: 4998,5823 5125,5923
  rectangle net VCC5V: 5064,8203 5135,8274
  region net VCC5V: 5064,8285 5064,8221 5235,8221 5235,8285
  region net VBAT: 4846,8276 4846,8205 4924,8205 4924,8276
  rectangle net VCC5V: 5170,8265 5203,8387
  rectangle net VCC5V: 5169,8227 5291,8367
  rectangle net VBAT: 3940,6271 4220,6636
  rectangle net NetC1_2: 4122,6054 4510,6085
  rectangle net NetC1_2: 3954,6054 4295,6219
  rectangle net NetC1_2: 4439,6068 4549,6146
  rectangle net VCC8V: 4575,6016 4877,6136
  rectangle net VCC8V: 4617,5564 4877,6071
  rectangle net GND: 3674,6179 3884,6266
  rectangle net GND: 3760,5992 3883,6216
  rectangle net GND: 3852,6015 4468,6045
  rectangle net GND: 3812,5935 4267,6038
  rectangle net GND: 4487,5509 4575,5986
  rectangle net GND: 4421,5990.94 4469,6026
  rectangle net VCC8V: 4701,5557 4942,5918
  rectangle net NetC18_2: 5096,5607 5127,6227
  rectangle net NetC18_2: 4999,5591 5127,5859
  region net GND: 5177.57,6096.57 5204.44,6123.44 5168.46,6159.41 5141.59,6132.54
  rectangle net GND: 5136,5458 5197,5718
  rectangle net VBAT: 5572,7638 5733,7748
  rectangle net VBAT: 4659,7544 4770,7719
Bottom Layer:
  rectangle net 2B: 6064,6457 6153,6496
  rectangle net VCC12V: 6390,6477 6457,6534
  rectangle net VCC12V: 6122,6536 6183,6590
  rectangle net 1A: 6317,6526 6351,6603
  rectangle net 2A: 6282,6612 6334,6664
  rectangle net GND: 5193,6838 5284,6934
  rectangle net GND: 6008,6969 6189,7035
  rectangle net GND: 5710,6969 5883,7035
  rectangle net GND: 5418,6970 5599,7035
  rectangle net GND: 6161,6799 6202,7035
  rectangle net GND: 6008,6813 6049,7035
  rectangle net GND: 5856,6786 5897,7035
  rectangle net GND: 5710,6794 5752,7035
  rectangle net GND: 5564,6797 5605,7035
  rectangle net GND: 5418,6786 5460,7035
  rectangle net D: 6216,6880 6237,7163
  rectangle net BAT-: 6160,7082 6202,7222
  rectangle net BAT-: 6008,7081 6050,7221
  rectangle net BAT-: 5855,7084 5897,7224
  rectangle net BAT-: 5710,7083 5752,7223
  rectangle net BAT-: 5563,7085 5605,7225
  rectangle net BAT-: 5422,7206 5611,7504
  rectangle net BAT-: 5418,7082 5459,7399
  rectangle net D: 5380,6879 5407,7163
  rectangle net COUT: 5472,6882 5547,6956
  rectangle net COUT: 5765,6882 5841,6957
  rectangle net D: 5910,6885 5993,7161
  rectangle net COUT: 6062,6883 6149,6955
  rectangle net DOUT: 6061,7087 6147,7159
  rectangle net DOUT: 5764,7088 5842,7157
  rectangle net D: 5621,6881 5697,7160
  rectangle net DOUT: 5475,7083 5551,7160
  rectangle net GND: 5138,5966 5252,5976
  rectangle net GND: 5501.65,5855 5548,5924
  rectangle net GND: 5495.3,5845 5508,5861.08
  rectangle net VBAT: 4649,7544 4770,7722
  rectangle net VBAT: 5573,7638 5733,7747
  rectangle net GND: 5157,5373 5283,5398
  rectangle net GND: 5187,5372 5262,5466

## Silkscreen, mask and mechanical layers (free items; w line width, h text height)
Top Overlay:
  lines w5: 3551,6532 3551,6838 3556,6843 3823,6843 3831,6835 3831,6529 ; 3724.07,7656.85 3944.55,7656.85 ; 3944.55,7436.38 3944.55,7656.85 ; 3944.55,7877.33 3944.55,7656.85 ; 4165.02,7656.85 3944.55,7656.85 ; 4973.15,8597.61 4980.47,8601.91 ; 4989.82,8585.99 4975.49,8610.4 4968.17,8606.1 4979.98,8585.99 ; 5009.51,8610.4 5241.79,8610.4 ; 5066.59,5291.89 5066.59,5252.52 5184.7,5252.52 5184.7,5291.89 ; 5125.65,5134.67 5125.65,5511.81 ; 5261.48,8585.99 5275.81,8610.4 5283.13,8606.1 5271.32,8585.99 ; 5270.83,8601.91 5278.15,8597.61 ; 6306.75,7656.85 6527.22,7656.85 ; 6585,7486 6316,7486 6316,7195 6333,7178 6595,7178 ; 4979.98,8585.99 5271.32,8585.99 ; 4979.98,8585.99 4979.98,8389.14 5271.32,8389.14 5271.32,8585.99 ; 4976.04,5291.89 4976.04,5389.14 5275.26,5389.14 5275.26,5291.89 4976.04,5291.89
Bottom Overlay:
  text "POWER_V2.1_20190611" at 4509,6821 h30
Solder Side:
  rectangle: 6184,6315 6392,6464
  region: 6471,6427 6449.79,6448.21 6365.29,6363.71 6386.5,6342.5
  rectangle: 6364,6412 6498,6464
  rectangle: 6382,6390 6416,6422
  rectangle: 6184,5846 6329,6323
  rectangle: 6103,5843 6260,6280
  rectangle: 6324,6256 6392,6323
  rectangle: 6322,5916 6457,6076
  rectangle: 6319,5842 6403,5929
  region: 6459.29,5914.21 6416.77,5947.43 6359.63,5874.29 6402.15,5841.07
  rectangle: 5505,7924 5975,8220
  rectangle: 4918,7999 5154,8370
  rectangle: 4880,8042 4974,8369

## Text inside footprints (layer, text, board x,y; h text height)
BAT1: Top Overlay "+" at 3656,6633 h30; Top Overlay "-" at 6541,7284 h30